# Altium PCB Ornament.PcbDoc
Units mil, origin at the board's own origin, x right, y up, seen from the top; angles counter-clockwise.
Board outline 3685 x 4010 mil, 2 copper layers (Top Layer, Bottom Layer); 87 components, 46 nets, 186 pads, 42 vias.
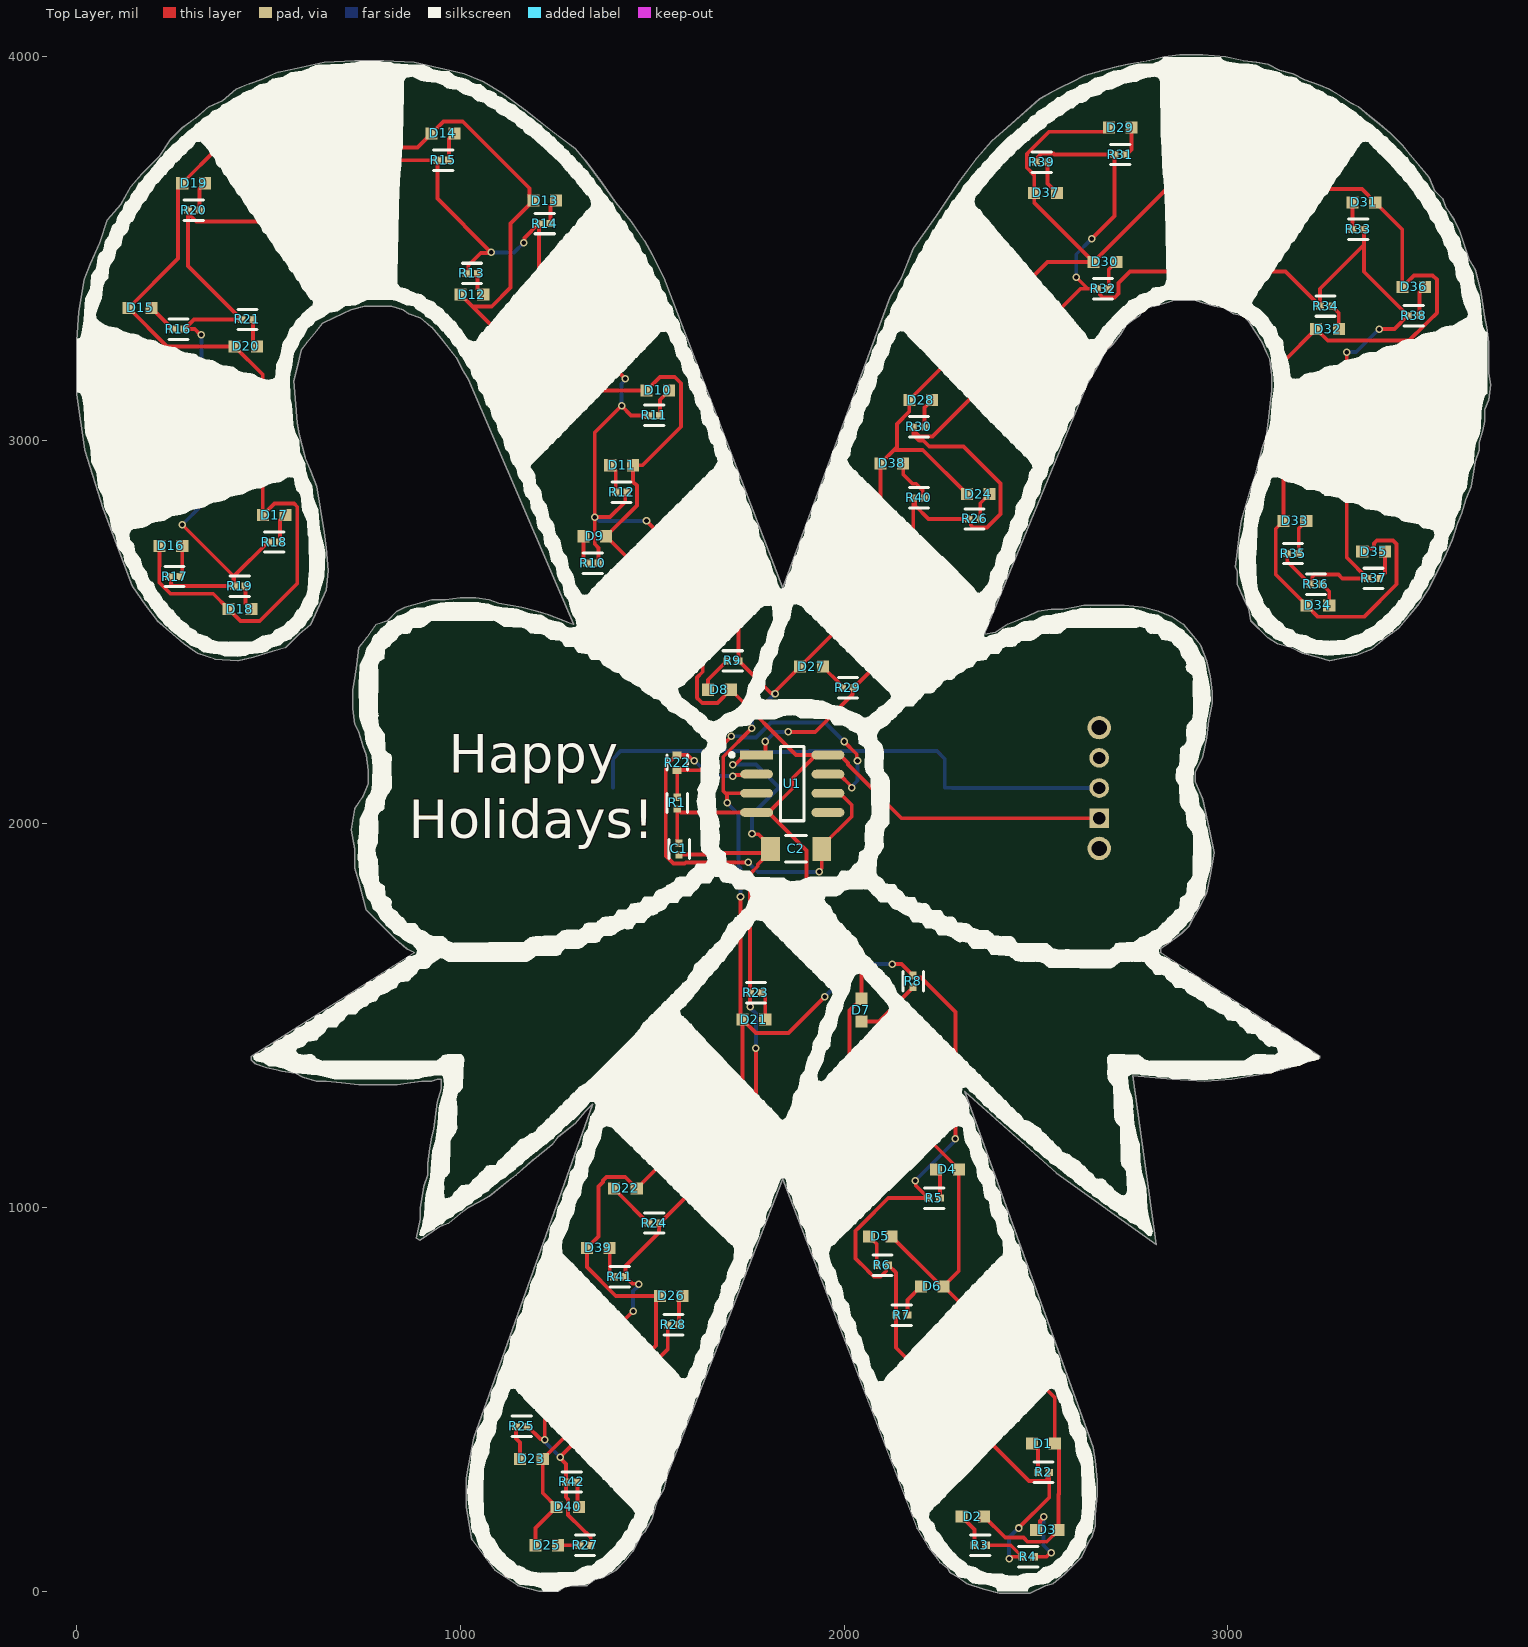
[diagram p0: Top Layer view]
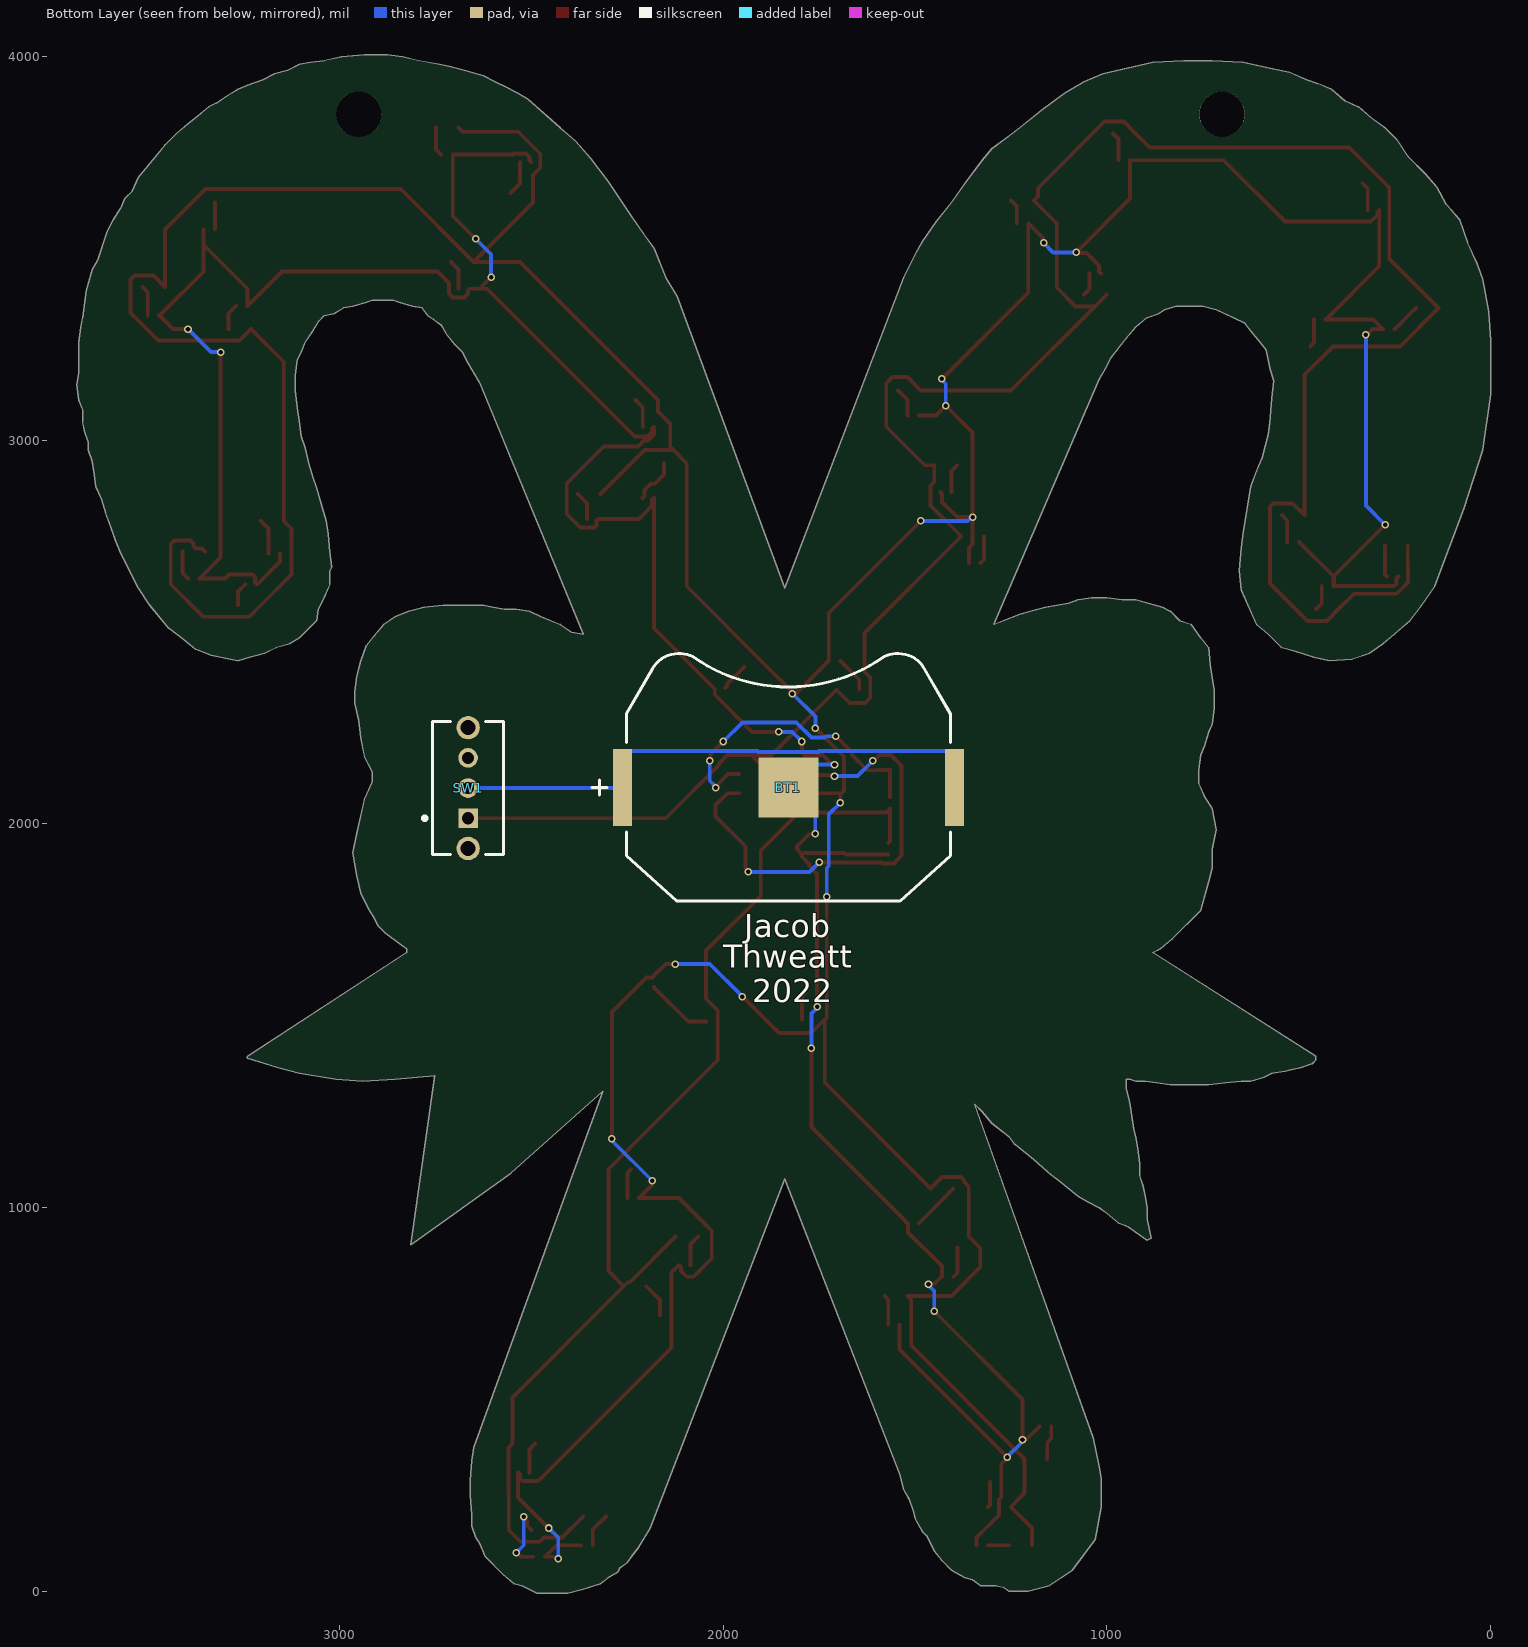
[diagram p1: Bottom Layer view, seen from below]
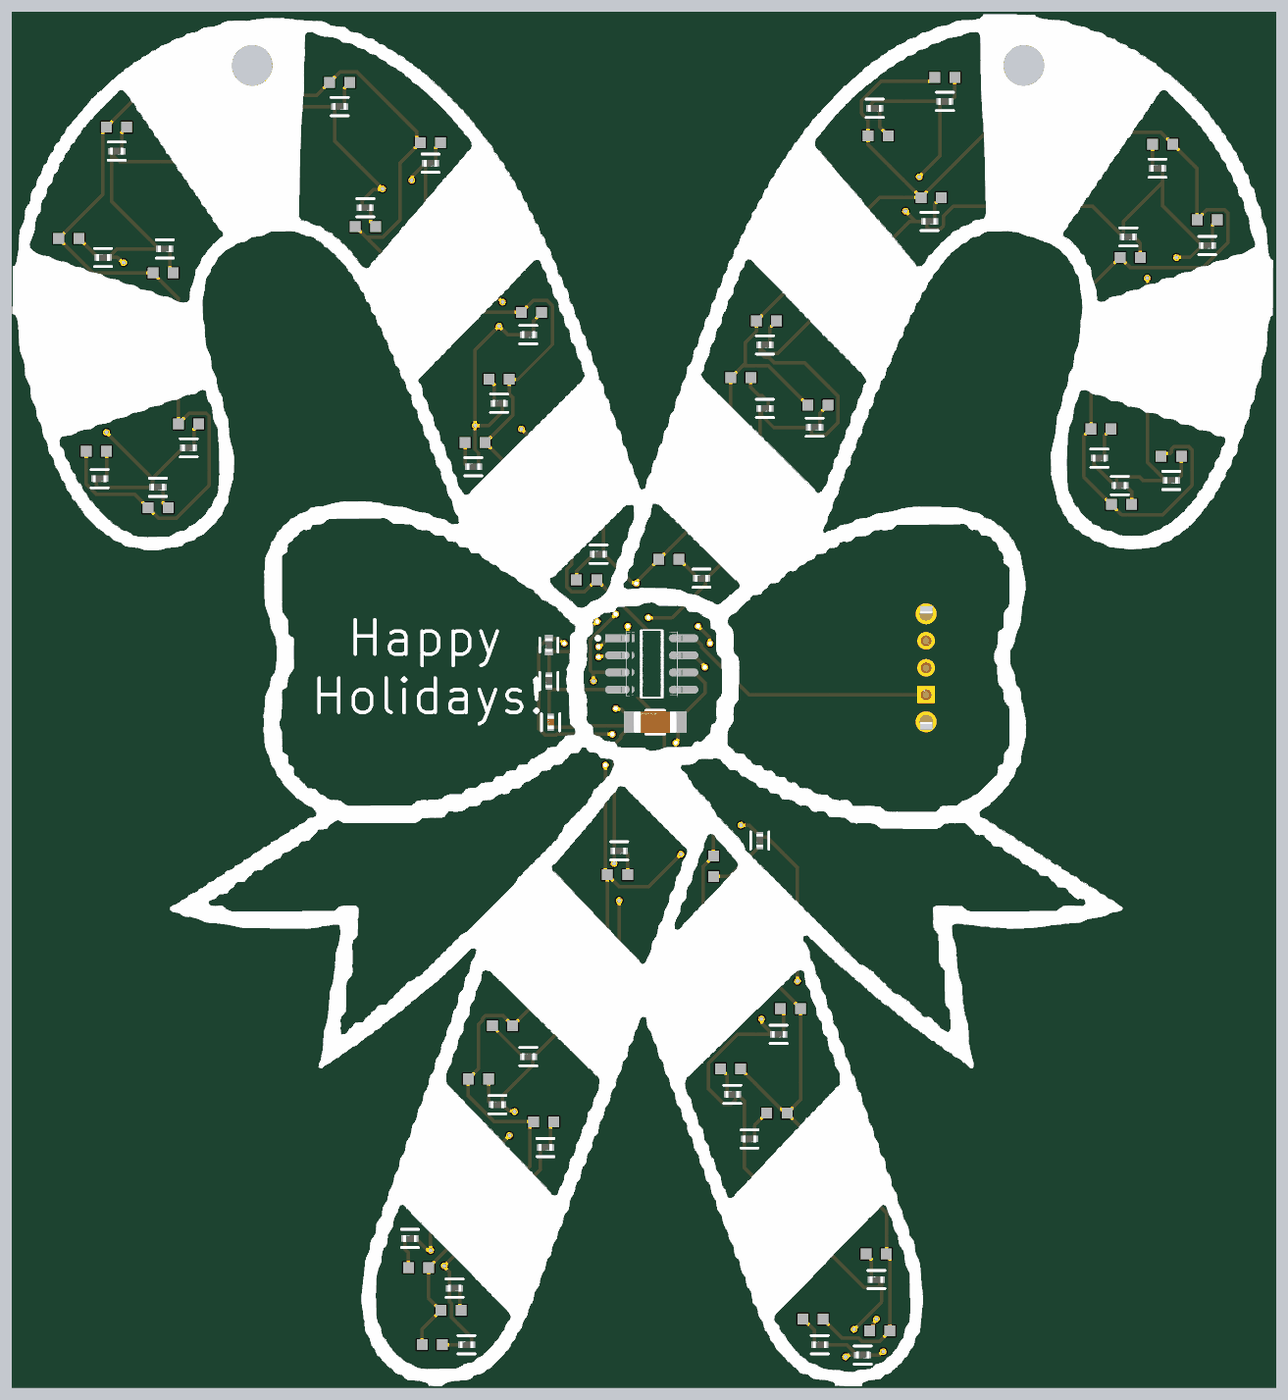
[diagram p2: 3D render of the assembled board from above, using the file's embedded part models]

## Layer stack, top to bottom
Top Solder: solder mask 0.4, Solder Resist, Dk 3.5
Top Layer: signal copper 1.4
Dielectric 1: dielectric 12.6, FR-4, Dk 4.8
Bottom Layer: signal copper 1.4
Bottom Solder: solder mask 0.4, Solder Resist, Dk 3.5

## Board outline
385 vertices, not listed, extent 0,-5 3685,4005

## Design rules (kind name [scope] priority, off if disabled: settings)
BoardOutlineClearance [All] p1: gap=7.87 ignorepadtopadclearanceinfootprint=FALSE except(15.75: Arc-SplitBarrior Arc-SplitContinuation Track-SplitBarrior Track-SplitContinuation SMDPad-SplitBarrior SMDPad-SplitContinuation THPad-SplitBarrior THPad-SplitContinuation Via-SplitBarrior Via-SplitContinuation Fill-SplitBarrior Fill-SplitContinuation Poly-SplitBarrior Poly-SplitContinuation Region-SplitBarrior Region-SplitContinuation Text-SplitBarrior Text-SplitContinuation)
Clearance "Clearance Bottom Layer" [OnLayer('Bottom Layer')] p1: gap=8 ignorepadtopadclearanceinfootprint=TRUE except(10: Arc-Text Track-Text SMDPad-Text THPad-Text Via-Text Fill-Text Poly-Text Region-Text Text-Text)
Clearance "Clearance Top Layer" [OnLayer('Top Layer')] p2: gap=8 ignorepadtopadclearanceinfootprint=TRUE except(10: Arc-Text Track-Text SMDPad-Text THPad-Text Via-Text Fill-Text Poly-Text Region-Text Text-Text)
Clearance [All] p3: gap=7.87 ignorepadtopadclearanceinfootprint=FALSE except(3.5: Arc-Arc Arc-Track Arc-SMDPad Track-Track Track-SMDPad SMDPad-SMDPad; 5: Arc-Via Track-Via SMDPad-Via THPad-Via Via-Via; 10: Arc-Text Track-Text SMDPad-Text THPad-Text Via-Text Fill-Text Poly-Text Region-Text Text-Text)
HoleSize [All] p1: absolutevalues=TRUE maxlimit=248.03 minlimit=7.87 maxpercent=80.000 minpercent=20.000
MinimumAnnularRing [All] p1: minimumring=3
MinimumSolderMaskSliver [All] p1: minsoldermaskwidth=3.94
PolygonConnect PolygonConnect_1 [All] p1: thpad.connectstyle=Relief thpad.reliefconductorwidth=20 thpad.reliefentries=4 thpad.polygonreliefangle="90 Angle" thpad.airgapwidth=10 smdpad.connectstyle=Relief smdpad.reliefconductorwidth=20 smdpad.reliefentries=4 smdpad.polygonreliefangle="90 Angle" smdpad.airgapwidth=10 via.connectstyle=Direct via.reliefconductorwidth=20 via.reliefentries=4 via.polygonreliefangle="90 Angle" via.airgapwidth=10
RoutingCorners [All] p1: cornerstyle=Round minsetback=100 maxsetback=100
RoutingVias [All] p1: holewidth=19.68 width=39.37 viastyle="Through Hole" minholewidth=7.87 minwidth=17.72 maxholewidth=39.37 maxwidth=78.74
SilkToSilkClearance [All] p1: silktosilkclearance=3.94
SilkToSolderMaskClearance [IsPad] p1: minsilkscreentomaskgap=3.94 clearancetoexposedcopper=TRUE
SolderMaskExpansion [All] p1: expansion=4 istentingtop=FALSE
Width [All] p1: maxlimit=100 minlimit=3.5 preferedwidth=15
25 further rules are at their usual default settings.

## Components (designator, comment, footprint, x,y, rotation, side; value= is the part's Value field where it differs from the comment)
BT1 "3034TR" FP-3034TR-MFG 1830,2121.5 r180 bottom
C1 "CL05B103KB5NNNC" FP-CL165-IPC_C 1570,1935 r270 top
C2 "JMK316BJ107ML-T" FP-MK316L-MFG 1875,1935 r180 top
D1 "KT-0603R" LED_0603 2519.53,385 r0 top
D2 "KT-0603R" LED_0603 2335.47,195 r0 top
D3 "KT-0603R" LED_0603 2529.53,160 r0 top
D4 "KT-0603R" LED_0603 2269.53,1100 r0 top
D5 "KT-0603R" LED_0603 2094.53,925 r0 top
D6 "KT-0603R" LED_0603 2230,795 r0 top
D7 "KT-0603R" LED_0603 2045,1515 r90 top
D8 "KT-0603R" LED_0603 1675,2350 r0 top
D9 "KT-0603R" LED_0603 1350,2750 r0 top
D10 "KT-0603R" LED_0603 1514.53,3130 r180 top
D11 "KT-0603R" LED_0603 1420,2935 r0 top
D12 "KT-0603R" LED_0603 1030,3380 r180 top
D13 "KT-0603R" LED_0603 1220,3625 r180 top
D14 "KT-0603R" LED_0603 954.53,3800 r180 top
D15 "KT-0603R" LED_0603 165,3345 r180 top
D16 "KT-0603R" LED_0603 245.47,2725 r180 top
D17 "KT-0603R" LED_0603 514.53,2805 r180 top
D18 "KT-0603R" LED_0603 425.47,2560 r180 top
D19 "KT-0603R" LED_0603 304.53,3670 r180 top
D20 "KT-0603R" LED_0603 440.47,3245 r180 top
D21 "C2290" LED_0603 1765,1490 r180 top
D22 "C2290" LED_0603 1430,1050 r0 top
D23 "C2290" LED_0603 1185,345 r0 top
D24 "C2290" LED_0603 2349.53,2860 r180 top
D25 "C2290" LED_0603 1225,120 r180 top
D26 "C2290" LED_0603 1549.53,770 r180 top
D27 "C2290" LED_0603 1915,2410 r180 top
D28 "C2290" LED_0603 2199.53,3105 r180 top
D29 "C2290" LED_0603 2719.53,3815 r180 top
D30 "C2290" LED_0603 2680,3465 r180 top
D31 "C2290" LED_0603 3355,3620 r0 top
D32 "C2290" LED_0603 3260,3290 r180 top
D33 "C2290" LED_0603 3175,2790 r180 top
D34 "C2290" LED_0603 3235,2570 r180 top
D35 "C2290" LED_0603 3380,2710 r180 top
D36 "C2290" LED_0603 3484.53,3400 r180 top
D37 "C2290" LED_0603 2525,3645 r180 top
D38 "C2290" LED_0603 2124.53,2940 r180 top
D39 "C2290" LED_0603 1359.53,895 r180 top
D40 "C2290" LED_0603 1280,220 r180 top
R1 "AC0402FR-071KL" FP-AC0402-IPC_C 1565,2054.9 r270 top
R2 "AC0402FR-071KL" FP-AC0402-IPC_C 2520,310 r180 top
R3 "AC0402FR-071KL" FP-AC0402-IPC_C 2355,120 r180 top
R4 "AC0402FR-071KL" FP-AC0402-IPC_C 2480.1,90 r0 top
R5 "AC0402FR-071KL" FP-AC0402-IPC_C 2235,1025 r0 top
R6 "AC0402FR-071KL" FP-AC0402-IPC_C 2100,850 r180 top
R7 "AC0402FR-071KL" FP-AC0402-IPC_C 2150.1,720 r0 top
R8 "AC0402FR-071KL" FP-AC0402-IPC_C 2180,1590 r270 top
R9 "AC0402FR-071KL" FP-AC0402-IPC_C 1710.1,2425 r180 top
R10 "AC0402FR-071KL" FP-AC0402-IPC_C 1344.9,2680 r180 top
R11 "AC0402FR-071KL" FP-AC0402-IPC_C 1505.1,3065 r0 top
R12 "AC0402FR-071KL" FP-AC0402-IPC_C 1419.9,2865 r180 top
R13 "AC0402FR-071KL" FP-AC0402-IPC_C 1030,3435 r0 top
R14 "AC0402FR-071KL" FP-AC0402-IPC_C 1220,3565 r0 top
R15 "AC0402FR-071KL" FP-AC0402-IPC_C 955,3730 r0 top
R16 "AC0402FR-071KL" FP-AC0402-IPC_C 265.1,3290 r180 top
R17 "AC0402FR-071KL" FP-AC0402-IPC_C 255.1,2645 r0 top
R18 "AC0402FR-071KL" FP-AC0402-IPC_C 515,2735 r0 top
R19 "AC0402FR-071KL" FP-AC0402-IPC_C 425.1,2620 r0 top
R20 "AC0402FR-071KL" FP-AC0402-IPC_C 305.1,3600 r0 top
R21 "AC0402FR-071KL" FP-AC0402-IPC_C 444.9,3315 r0 top
R22 "AC0402FR-0710KL" FP-AC0402-MFG 1565,2160 r270 top
R23 "AC0402FR-071KL" FP-AC0402-IPC_C 1770.1,1560 r0 top
R24 "AC0402FR-071KL" FP-AC0402-IPC_C 1505,960 r180 top
R25 "AC0402FR-071KL" FP-AC0402-IPC_C 1159.9,430 r180 top
R26 "AC0402FR-071KL" FP-AC0402-IPC_C 2340.1,2795 r0 top
R27 "AC0402FR-071KL" FP-AC0402-IPC_C 1325,120 r180 top
R28 "AC0402FR-071KL" FP-AC0402-IPC_C 1555.1,695 r0 top
R29 "AC0402FR-071KL" FP-AC0402-IPC_C 2010,2355 r180 top
R30 "AC0402FR-071KL" FP-AC0402-IPC_C 2195,3035 r0 top
R31 "AC0402FR-071KL" FP-AC0402-IPC_C 2719.9,3745 r0 top
R32 "AC0402FR-071KL" FP-AC0402-IPC_C 2675,3395 r0 top
R33 "AC0402FR-071KL" FP-AC0402-IPC_C 3339.9,3550 r180 top
R34 "AC0402FR-071KL" FP-AC0402-IPC_C 3255,3350 r0 top
R35 "AC0402FR-071KL" FP-AC0402-IPC_C 3170.1,2705 r0 top
R36 "AC0402FR-071KL" FP-AC0402-IPC_C 3230,2625 r0 top
R37 "AC0402FR-071KL" FP-AC0402-IPC_C 3380,2640 r0 top
R38 "AC0402FR-071KL" FP-AC0402-IPC_C 3485.1,3325 r0 top
R39 "AC0402FR-071KL" FP-AC0402-IPC_C 2515.1,3725 r0 top
R40 "AC0402FR-071KL" FP-AC0402-IPC_C 2195.1,2850 r0 top
R41 "AC0402FR-071KL" FP-AC0402-IPC_C 1415,820 r180 top
R42 "AC0402FR-071KL" FP-AC0402-IPC_C 1290.1,285 r0 top
SW1 "1825232-1" FP-1825232-1-MFG 2665,2093.74 r90 bottom
U1 "TLC555CDR" FP-D0008A-IPC_B 1865,2105 r0 top

## Footprints (in the part's own frame and the unit in brackets; to place one, negate y for a bottom-side part, rotate by r counter-clockwise, add the part's x,y. Pads: shape width x height; smd on the part's side, far side on the other; paste and mask are expansions set on the pad)
FP-3034TR-MFG [mil]
  rect 156x156 smd paste-39370.1 mask+0: 1(0,-26.5)
  rect 50x200 smd paste+0 mask+0: 2(-432.48,-26.5) 2(432.48,-26.5)
  silkscreen extent -512,-322 422,323, body extent -458,-331 458,317, height 170
FP-1825232-1-MFG [mm]
  rect 1.3x1.3 hole 0.8 paste-1000 mask+0: 1(-2,0)
  round 1.3 hole 0.8 paste-1000 mask+0: 2(0,0) 3(2,0)
  round 1.55 hole 1 paste-1000 mask+0: 4(-4,0) 5(4,0)
  silkscreen extent -4.4,-2.35 4.4,3, body extent -4.58,-2.15 4.59,5.15, height 3.53
FP-AC0402-IPC_C [mil]
  rect 20.29x18.6 smd paste+0 mask+0: 1(-14.9,0) 2(14.9,0)
  silkscreen extent -25,-27 25,27, body extent -29,-15 29,15, height 10
FP-AC0402-MFG [mm]
  rect 0.5x0.6 smd paste+0 mask+0: 1(-0.5,0) 2(0.5,0)
  silkscreen extent -0.5,-0.67 0.5,0.67, body extent -0.85,-0.4 0.85,0.4, height 0.25
FP-CL165-IPC_C [mil]
  rect 20.29x18.6 smd paste+0 mask+0: 1(-14.9,0) 2(14.9,0)
  silkscreen extent -25,-27 25,27, body extent -29,-15 29,15, height 10
FP-D0008A-IPC_B [mil]
  rect 85.4x22.92 smd paste+0 mask+0: 1(-93.06,75)
  rrect100% 85.4x22.92 smd paste+0 mask+0: 2(-93.06,25) 3(-93.06,-25) 4(-93.06,-75) 5(93.06,-75) 6(93.06,-25) 7(93.06,25) 8(93.06,75)
  silkscreen extent -162,-97 31,97, body extent -146,-106 146,106, height 10
FP-MK316L-MFG [mm]
  rect 1.25x1.6 smd paste+0 mask+0: 1(-1.7,0) 2(1.7,0)
  silkscreen extent -0.7,-0.87 0.7,0.87, body extent -2.42,-0.97 2.42,0.97, height 0.25
LED_0603 [mm]
  rect 0.8x0.8 smd: 1(0.75,0) 2(-0.75,0)
  body extent -1.27,-0.51 1.27,0.51, height 0.51

## Part data
BT1: library part CMP-19636-000007-1, "BATTERY RETAINER COIN 20MM SMD", Case/Package=SMD/SMT, Package Quantity=500, Contact Plating=Tin, Lead Free="Lead Free", Material=Bronze, Mount="Surface Mount", Number of Batteries=1, Number of Cells=1, Packaging="Tape and Reel", Termination=SMD/SMT
C1: library part CMP-13271-000387-1, "Cap Ceramic 10nF 50V X7R ±10% SMD 0402 +125°C Paper T/R", Capacitance=10nF, Case Code (Imperial)=0402, Case Code (Metric)=1005, Dielectric=X7R, Max Operating Temperature=125°C, Min Operating Temperature=-55°C, Package Quantity=1, Tolerance=10%, Voltage=50V, Case/Package=0402, Contact Plating=Tin, Depth=0.5mm, Height=0.5mm, Lead Free="Lead Free", Length=1mm, Material=Ceramic, Mount="Surface Mount", Packaging="Tape and Reel", Radiation Hardening=No, Thickness=0.022inch, Voltage Rating=50V, Voltage Rating (DC)=50V, Width=0.02inch
C2: library part CMP-2000-06499-2, "CAP CER 100UF 6.3V X5R 1206", Capacitance=100uF, Case Code (Imperial)=1206, Case Code (Metric)=3216, Dielectric=X5R, Max Operating Temperature=85°C, Min Operating Temperature=-55°C, Package Quantity=1, Tolerance=2%, Voltage Rating=6.3V, Case/Package=1206, Construction=Flat, Depth=1.6mm, Height=1.6mm, Lead Free="Lead Free", Length=3.2mm, Mount="Surface Mount", Number of Pins=2, Packaging="Tape and Reel", Radiation Hardening=No, RoHS Compliant=Yes, Series=M, Termination=SMD/SMT, Thickness=0.071inch, Voltage Rating (DC)=6.3V, Width=0.063inch
D1 D2 D3 D4 D5 D6 D7 D8 D9 D10 D11 D12 D13 D14 D15 D16 D17 D18 D19 D20: "Red 615~630nm 1.9~2.2V 0603 Light Emitting Diodes (LED) RoHS"
D21 D22 D23 D24 D25 D26 D27 D28 D29 D30 D31 D32 D33 D34 D35 D36 D37 D38 D39 D40: "White 0603 Light Emitting Diodes (LED) RoHS"
R1 R2 R3 R4 R5 R6 R7 R8 R9 R10 R11 R12 R13 R14 R15 R16 R17 R18 R19 R20 R21 R23 R24 R25 R26 R27 R28 R29 R30 R31 R32 R33 R34 R35 R36 R37 R38 R39 R40 R41 R42: library part CMP-2002-01799-3, "RES 1kΩ ±1% 0.063W 0402", Case Code (Imperial)=0402, Case Code (Metric)=1005, Max Operating Temperature=155°C, Max Power Dissipation=63mW, Min Operating Temperature=-55°C, Package Quantity=1, Power Rating=62.5mW, Resistance=1kR, Resistor Type="Thick Film", Temperature Coefficient=100ppm/°C, Tolerance=1%, Voltage Rating=50V, Case/Package=0402, Construction=Rectangular, Depth=0.5mm, Features="Moisture Resistant", Height=0.015inch, Lead Free="Lead Free", Length=0.039inch, Military Standard=Not, Number of Terminations=2, Packaging="Tape and Reel", RoHS Compliant=Yes, Series=AC, Size Code=0402, Termination=SMD/SMT, Width=0.02inch
R22: library part CMP-2002-01790-3, "RES 10kΩ ±1% 0.063W 0402", Case Code (Imperial)=0402, Case Code (Metric)=1005, Max Operating Temperature=155°C, Max Power Dissipation=63mW, Min Operating Temperature=-55°C, Power Rating=62.5mW, Resistance=10kR, Resistor Type="Thick Film", Temperature Coefficient=100ppm/°C, Tolerance=1%, Voltage Rating=50V, Case/Package=0402, Construction=Rectangular, Depth=0.5mm, Features="Moisture Resistant", Height=0.015inch, Lead Free="Lead Free", Length=0.039inch, Military Standard=Not, Number of Terminations=2, Packaging="Tape and Reel", RoHS Compliant=Yes, Series=AC, Size Code=0402, Termination=SMD/SMT, Width=0.02inch
SW1: library part CMP-03405-000001-1, "SWITCH SLIDE SPDT 200MA 30V", Contact Current Rating=0.2A, Contact Resistance=20mΩ, Manufacturer="TE Connectivity", Operating Force=200gf, Temperature="-20°C to +70°C", Temperature Range High=+70°C, Temperature Range Low=-20°C, Voltage Rating Dc=30V, Automotive=No, Category=Switch, ComponentLink2Description=Datasheet, ComponentLink2URL=https://www.te.com/commerce/DocumentDelivery/DDEController?Action=showdoc&DocId=Customer+Drawing%7F1825232%7FB2%7Fpdf%7FEnglish%7FENG_CD_1825232_B2.pdf%7F1825232-1, Device Class L1=Electromechanical, Device Class L2=Switches, Device Class L3="Slide Switches", Digikey Description="SWITCH SLIDE SPDT 200MA 30V", Electromechanical Life=10000Cycles, Height=3.7mm, Lead Free=Yes, Manufacturer Part Number=1825232-1, Mount="Through Hole", Mouser Description="Slide Switches SLIDE SWITCH SPDT Right Angle", Octopart=https://octopart.com/1825232-1-te+connectivity-45209882, Package=1825232-1, RoHS=TRUE, Throw Configuration=SPDT
U1: library part CMP-04857-000001-1, "IC OSC SGL TIMER 2.1MHZ 8-SOIC", Case/Package=SOIC, Current Rating=250A, Frequency=2.1MHz, High Level Output Current=-10mA, Low Level Output Current=100mA, Max Operating Temperature=125°C, Max Power Dissipation=725mW, Max Supply Voltage=15V, Min Operating Temperature=-40°C, Min Supply Voltage=2V, Operating Supply Current=360uA, Package Quantity=2500, Quiescent Current=250uA, Height=1.58mm, Lead Free="Lead Free", Length=4.9mm, Mount="Surface Mount", Number of Channels=1, Number of Pins=8, Number of Timers/Counters=1, Packaging="Tape and Reel", Power Dissipation=725mW, Radiation Hardening=No, REACH SVHC="No SVHC", Termination=SMD/SMT, Weight=0.002561oz, Width=3.91mm

## Free pads (board coordinates)
  round 118.11 hole 118.11: HOLE(700,3850) HOLE(2950,3850)

## Via types
v1: diameter 19.68, hole 11.81, Top Layer to Bottom Layer, 42 vias

## Nets (pads, with @x,y where several pads share a name; then routed paths per layer and width w, separated by ;. In a path a pad name is that pad's centre, name@x,y a point inside that pad or via, vN(x,y) a via of type N, cw(c..) or ccw(c..) an arc to the next point about the centre after c; other vN are vias at no path point)
3V: C1.1 D1.1 D2.1 D3.1 D4.1 D5.1 D6.1 D7.1 D8.1 D9.1 D10.1 D11.1 D12.1 D13.1 D14.1 D15.1 D16.1 D17.1 D18.1 D19.1 D20.1 R1.2 SW1.1 U1.4 U1.8 | length 9609.5
  Top Layer w10: D16.1 215.94,2672.32 215.05,2671.42 215.05,2629.49 244.42,2600.12 355.83,2600.12 D18.1 426.69,2529.25 476.96,2529.25 574.8,2627.09 574.8,2826.96 566.02,2835.75 515.75,2835.75 D17.1 485,3170.94 D20.1 235.47,3245 D15.1 264.25,3473.78 264.25,3659.25 D19.1 368.13,3763.13 888.13,3763.13 D14.1 955.75,3830.75 1006.02,3830.75 1179.72,3657.04 1179.72,3635.75 D13.1 1130.61,3565.13 1130.61,3398.37 1081.49,3349.25 1031.22,3349.25 ; D12.1 1031.22,3349.25 ; R1.2 R1.2@1565,2039.16 ; C1.1 1570,1950.75 1565,1955.75 R1.2@1565,2039.16 ; D5.1 2243.31,805.75 2248.78,805.75 D6.1 ; D2.1 2420,140 2467.29,140 2478.04,129.25 2528.31,129.25 D3.1 2559.06,252 2560.05,252.99 2560.05,334.25 2559.8,334.49 2559.8,374.25 D1.1 2549.06,505.47 D6.1 ; SW1.1 2149.87,2015 2010.16,2154.71 2010.16,2159.14 1989.3,2180 U1.8@1926.81,2180 ; 1031.22,3349.25 1250.47,3130 D10.1 1520,3165 1558.76,3165 1565.01,3158.75 1565.19,3158.75 1575,3148.94 1575,3035.35 1474.65,2935 D11.1 1450,2934.53 1450,2891.85 1459.95,2881.89 1459.95,2830.43 D9.1 1631.68,2497.85 1631.68,2396.68 1616.85,2381.85 1616.85,2371.26 1616.72,2371.13 1616.72,2328.87 1624.34,2321.25 1624.52,2321.25 1630.25,2315.52 1670.05,2315.52 D8.1 1874.53,2180 U1.8@1926.81,2180 ; R1.2@1565,2039.16 1574.16,2030 U1.4 U1.4@1803.19,2030 ; U1.4@1803.19,2030 1902.32,1930.86 1902.32,1812.66 2045,1669.98 D7.1 2014.25,1513.78 2014.25,1384.8 D4.1 2299.06,834.53 D6.1 ; U1.4@1803.19,2030 1865,2091.81 1865,2118.19 U1.8@1926.81,2180
GND: BT1.1 C1.2 C2.2 R23.1 R24.1 R25.1 R26.1 R27.1 R28.1 R29.1 R30.1 R31.1 R32.1 R33.1 R34.1 R35.1 R36.1 R37.1 R38.1 R39.1 R40.1 R41.1 R42.1 U1.1 | length 8462.8
  Top Layer w10: R25.1 1175.65,430 1208.8,396.85 1218.15,396.85 v1(1220,395) 1220,500 v1(1450,730) ; R27.1 1339.9,140.1 1310.49,169.51 1310.32,169.51 1288.57,191.25 1288.39,191.25 1280.78,198.87 1280.78,239.57 1275.19,245.16 1275.19,332.19 1260,347.38 v1(1260,350) 1540.19,630.19 R28.1 ; v1(1465,800) 1463.15,801.85 1448.89,801.85 1430.75,820 R41.1 1429.9,847.57 1518.03,935.7 1518.03,958.13 R24.1 1520.75,960 1525.05,964.3 1525.05,965.14 1770,1210.1 v1(1770,1415) ; C1.2 1679.01,1920.1 1683.76,1924.84 1788.46,1924.84 C2.2@1793.17,1920.14 ; v1(1710,2155) 1711.85,2156.85 1717.56,2156.85 1740.7,2180 U1.1 1788.54,2180 1795,2186.46 v1(1795,2215) ; v1(1755.19,1523.14) 1755.19,1870.06 1774.84,1889.71 1774.84,1894.88 1796.61,1916.65 1796.61,1923.54 C2.2 ; v1(1760,1975) 1761.85,1973.15 1776.81,1973.15 1808.07,1941.89 C2.2 ; C2.2@1793.17,1920.1 1804.63,1931.56 C2.2 ; v1(1855,2240) 1925,2240 2022.12,2337.12 2022.12,2352.22 R29.1 2025.75,2355 2030.05,2359.3 2030.05,2360.14 2180.19,2510.29 R40.1 2181.04,2850 2185.34,2845.7 2185.34,2829.66 2220,2795 2326.04,2795 2330.34,2790.7 2330.34,2778.56 2336.19,2772.7 2372.7,2772.7 2407.68,2807.68 2407.68,2838.74 2407.8,2838.87 2407.8,2887.2 2311.38,2983.62 2221.83,2983.62 2206.19,2999.26 2195.74,2999.26 2180.1,3014.9 R30.1 2180.94,3035 2185.24,3030.7 2185.24,3021.83 2197.07,3010 2230.78,3010 2615.78,3395 2635,3395 ; R39.1 2501.04,3725 2505.34,3729.3 2505.34,3738.17 2514.47,3747.3 2545.53,3747.3 2547.83,3745 R31.1 2705,3585 v1(2645,3525) ; v1(2605,3425) 2635,3395 ; R35.1 3155.19,2684.06 3214.25,2625 R36.1 ; R36.1@3220.24,2629.3 3220.24,2644.07 3226.1,2649.93 3288.35,2649.93 3298.28,2640 R37.1@3364.25,2640 ; v1(3310,3230) 3310,2694.25 R37.1@3364.25,2640 ; R33.1 3354.81,3509.93 ; R37.1 R37.1@3364.25,2640 ; v1(3395,3290) 3434.35,3290 R38.1@3469.35,3325 ; R38.1 R38.1@3469.35,3325 ; 2635,3395 2660.94,3395 2665.24,3390.7 2665.24,3386.36 2666.76,3384.84 2666.76,3380.31 2674.37,3372.7 2705.43,3372.7 2715,3382.27 2715,3410 2745,3440 3150.1,3440 R34.1 3240.1,3395.22 3354.81,3509.93 ; 3354.81,3509.93 3354.81,3439.54 R38.1@3469.35,3325
  Bottom Layer w10: v1(1220,395) 1221.85,393.15 1221.85,388.15 v1(1260,350) ; v1(1450,730) 1450,782.38 1465,797.38 v1(1465,800) ; v1(1710,2155) 1770,2155 BT1.1 1760,2025 v1(1760,1975) ; v1(1755.19,1523.14) 1755.19,1520.52 1770,1505.71 v1(1770,1415) ; v1(1795,2215) 1820,2240 v1(1855,2240) ; v1(2605,3425) 2605,3485 v1(2645,3525) ; v1(3310,3230) 3335,3230 v1(3395,3290)
NetBT1_2: BT1.2 SW1.2 | length 1435.3
  Bottom Layer w10: BT1.2@1397.52,2095 1397.52,2169.84 1417.52,2189.84 1750.16,2189.84 1752,2188 1908,2188 1909.84,2189.84 2242.48,2189.84 2262.48,2169.84 2262.48,2095 2282.48,2093.74 SW1.2
NetC2_1: C2.1 R22.1 U1.2 U1.6 | length 1211.9
  Top Layer w10: v1(1610,2165) 1607.38,2165 1592.69,2179.68 R22.1 1563.03,2179.68 1535,2151.65 1535,1917.44 1547.7,1904.74 1547.7,1904.57 1555.31,1896.95 1584.69,1896.95 1587.73,1900 v1(1750,1900) ; v1(1710,2125) 1712.62,2125 1715.15,2127.53 1769.47,2127.53 U1.2 ; v1(1935,1875) 1935,1877.62 1941.93,1884.55 C2.1 1941.93,1941.89 2020,2019.96 2020,2049.3 1989.3,2080 U1.6
  Bottom Layer w10: v1(1610,2165) 1650,2125 v1(1710,2125) ; v1(1750,1900) 1775,1875 v1(1935,1875)
NetD1_2: D1.2 R2.2 | length 81.3
  Top Layer w10: D1.2 2505.1,369.9 R2.2
NetD2_2: D2.2 R3.2 | length 89.1
  Top Layer w10: D2.2 2340.1,160.85 R3.2
NetD3_2: D3.2 R4.2 | length 195.4
  Top Layer w10: R4.2 2527.38,90 2537.38,100 v1(2540,100) ; D3.2 2510.75,170.75 2510.75,183.13 2520,192.38 v1(2520,194.87)
  Bottom Layer w10: v1(2520,194.87) 2520,120 v1(2540,100)
NetD4_2: D4.2 R5.2 | length 79.1
  Top Layer w10: D4.2 2249.9,1090.1 R5.2
NetD5_2: D5.2 R6.2 | length 83.3
  Top Layer w10: D5.2 2085.1,904.9 R6.2
NetD6_2: D6.2 R7.2 | length 89.7
  Top Layer w10: R7.2 2165,759.53 D6.2
NetD7_2: D7.2 R8.2 | length 172.6
  Top Layer w10: D7.2 2091.22,1485.47 2180,1574.25 R8.2
NetD8_2: D8.2 R9.2 | length 96.1
  Top Layer w10: D8.2 1645.47,2376.12 1694.35,2425 R9.2
NetD9_2: D9.2 R10.2 | length 74.4
  Top Layer w10: D9.2 1320.47,2688.68 1329.16,2680 R10.2
NetD10_2: D10.2 R11.2 | length 75
  Top Layer w10: R11.2 1520,3105.94 D10.2
NetD11_2: D11.2 R12.2 | length 76
  Top Layer w10: D11.2 1405,2920.47 R12.2
NetD12_2: D12.2 R13.2 | length 61.1
  Top Layer w10: R13.2 1044.9,3394.62 D12.2
NetD13_2: D13.2 R14.2 | length 66.1
  Top Layer w10: R14.2 1234.9,3610.38 D13.2
NetD14_2: D14.2 R15.2 | length 75.9
  Top Layer w10: R15.2 969.9,3785.85 D14.2
NetD15_2: D15.2 R16.2 | length 78.6
  Top Layer w10: D15.2 205.28,3334.25 205.28,3334.07 249.35,3290 R16.2
NetD16_2: D16.2 R17.2 | length 82.5
  Top Layer w10: R17.2 270.7,2645 275,2649.3 D16.2
NetD17_2: D17.2 R18.2 | length 75.9
  Top Layer w10: R18.2 529.9,2790.85 D17.2
NetD18_2: D18.2 R19.2 | length 66.2
  Top Layer w10: R19.2 440,2575 D18.2
NetD19_2: D19.2 R20.2 | length 75.8
  Top Layer w10: R20.2 320,3655.94 D19.2
NetD20_2: D20.2 R21.2 | length 74.2
  Top Layer w10: R21.2 459.81,3255.19 D20.2
NetD21_1: D21.1 D22.1 D23.1 D24.1 D25.1 D26.1 D27.1 D28.1 D29.1 D30.1 D31.1 D32.1 D33.1 D34.1 D35.1 D36.1 D37.1 D38.1 D39.1 D40.1 R2.1 R3.1 R4.1 R5.1 R6.1 R7.1 R8.1 R9.1 R10.1 R11.1 R12.1 R13.1 R14.1 R15.1 R16.1 R17.1 R18.1 R19.1 R20.1 R21.1 U1.3 | length 15939.5
  Top Layer w10: R17.1@240.32,2645.13 R17.1 241.04,2645 245.34,2640.7 245.34,2625.86 251.19,2620 R19.1 ; v1(275,2780) 408.08,2646.92 408.08,2622.11 R19.1 ; R16.1 R16.1@280.84,3290 ; R20.1 290.19,3453.96 R21.1@429.16,3315 ; R20.1@295.34,3595.7 295.34,3586.83 304.47,3577.7 304.65,3577.7 312.35,3570 535.82,3570 695.82,3730 R15.1 940.1,3629.9 v1(1080,3490) 1078.15,3488.15 1053.15,3488.15 1020.24,3455.24 1020.24,3439.3 1015.94,3435 R13.1 ; v1(325,3275) 322.38,3275 307.38,3290 R16.1@280.84,3290 ; R21.1 R21.1@429.16,3315 ; R18.1 499.25,2735 410.19,2645.94 R19.1 ; v1(1165,3515) 1166.85,3516.85 1166.85,3527.6 1204.25,3565 R14.1 1205.1,3384.9 v1(1430,3160) ; D25.1 1195.47,165 D40.1 1214.53,255.94 D23.1 1510,640.47 1510,760 D26.1 1405,770 1330,845 D39.1 1360.07,925.07 1360.07,1055.07 1371.72,1066.72 1371.72,1071.13 1380.59,1080 1429.53,1080 D22.1 1735.47,1325.94 D21.1 ; R10.1 1359.81,2719.84 1350,2729.65 v1(1350,2800) ; R12.1@1433.96,2865 1429.66,2860.7 1429.66,2839.66 1390,2800 v1(1350,2800) ; v1(1485,2790) 1725,2550 R9.1 1725.84,2425 1808.99,2341.85 1818.15,2341.85 v1(1820,2340) 1821.85,2341.85 1821.85,2346.38 D27.1 2095,2619.53 D38.1 2130,2975 ; R11.1 1445,3065 v1(1420,3090) 1350,3020 v1(1350,2800) ; v1(1695,2055) 1695,2080 ; v1(1730,1810) 1730,1495.47 D21.1 ; v1(1759.87,2250.13) 1685.16,2175.42 1685.16,2085.86 1691.02,2080 U1.3 ; v1(1950,1550) 1855,1455 1770.47,1455 D21.1 ; v1(2125,1635) 2149.9,1635 2174.86,1610.05 2175.7,1610.05 2180,1605.75 R8.1 ; R8.1@2184.3,1599.76 2200.24,1599.76 2290,1510 v1(2290,1180) ; v1(2185,1070) 2186.85,1068.15 2186.85,1057.4 R5.1@2219.25,1025 ; R5.1 R5.1@2219.25,1025 ; D24.1 2205,2975 2130,2975 ; R3.1 2434.35,120 R4.1@2464.35,90 ; v1@2437.62,90 R4.1@2464.35,90 ; v1(2455,165) 2534.9,244.9 R2.1 2534.06,310 2529.76,305.7 2529.76,293.56 2523.9,287.7 2482.3,287.7 2135.19,634.81 R7.1 2135.19,830.56 2115.75,850 2114.06,850 2109.76,845.7 2109.76,834.76 2095,820 2077.27,820 2061.95,835.31 2061.95,835.49 2030,867.44 2030,939.7 2036.25,945.95 2036.25,946.13 2043.87,953.75 2044.05,953.75 2115.3,1025 R5.1@2219.25,1025 ; R4.1 R4.1@2464.35,90 ; D29.1 2679.25,3804.25 2534.25,3804.25 2477.05,3747.05 2477.05,3710.31 2495.47,3691.89 D37.1 2495.47,3620 D30.1 ; D35.1 3358.73,2718.26 3374.92,2718.26 3380.78,2724.12 3380.78,2731.13 3388.39,2738.75 3430.66,2738.75 3440,2729.41 3440,2625 3355,2540 3235.47,2540 D34.1 3125,2650.47 3125,2769.53 D33.1 3145.47,3205 D32.1 3260.47,3260 3472.65,3260 3515.35,3302.7 3515.53,3302.7 3523.14,3310.31 3523.14,3310.49 3545,3332.35 3545,3418.94 3533.94,3430 3485,3430 D36.1 3455,3549.53 D31.1 3349.53,3655 2840.47,3655 D30.1 ; R16.1@280.84,3290 305.84,3315 R21.1@429.16,3315 ; 2130,2975 2137.87,2982.87 2137.87,3042.87 2170,3075 D28.1 2530,3465 D30.1
  Bottom Layer w10: v1(275,2780) 325,2830 v1(325,3275) ; v1(1080,3490) 1140,3490 v1(1165,3515) ; v1(1350,2800) 1352.62,2800 1362.62,2790 v1(1485,2790) ; v1(1420,3090) 1420,3147.38 1430,3157.38 v1(1430,3160) ; v1(1695,2055) 1725.16,2024.84 1725.16,1889.71 1730,1884.87 v1(1730,1810) ; v1(1759.87,2250.13) 1759.87,2279.87 v1(1820,2340) ; v1(1950,1550) 2035,1635 v1(2125,1635) ; v1(2185,1070) 2288.15,1173.15 2288.15,1178.15 v1(2290,1180) ; v1(2430,85) 2430,140 v1(2455,165)
NetD21_2: D21.2 R23.2 | length 74.4
  Top Layer w10: R23.2 1785.84,1560 1794.53,1551.32 D21.2
NetD22_2: D22.2 R24.2 | length 127.6
  Top Layer w10: D22.2 1411.22,1039.25 1411.22,1038.03 1489.25,960 R24.2
NetD23_2: D23.2 R25.2 | length 89.3
  Top Layer w10: R25.2 1145,398.53 1155.47,388.06 D23.2
NetD24_2: D24.2 R26.2 | length 75
  Top Layer w10: R26.2 2355,2835.94 D24.2
NetD25_2: D25.2 R27.2 | length 55.6
  Top Layer w10: D25.2 R27.2
NetD26_2: D26.2 R28.2 | length 78.8
  Top Layer w10: R28.2 1570,760.94 D26.2
NetD27_2: D27.2 R29.2 | length 76.4
  Top Layer w10: D27.2 1989.95,2364.58 1989.95,2359.3 1994.25,2355 R29.2
NetD28_2: D28.2 R30.2 | length 77.9
  Top Layer w10: R30.2 2209.9,3085.85 D28.2
NetD29_2: D29.2 R31.2 | length 76.4
  Top Layer w10: R31.2 2735.65,3745 2749.06,3758.4 D29.2
NetD30_2: D30.2 R32.2 | length 78.1
  Top Layer w10: R32.2 2689.9,3445.38 D30.2
NetD31_2: D31.2 R33.2 | length 70.2
  Top Layer w10: R33.2 3325,3619.53 D31.2
NetD32_2: D32.2 R34.2 | length 68.6
  Top Layer w10: R34.2 3270.75,3350 3289.53,3331.22 D32.2
NetD33_2: D33.2 R35.2 | length 93.1
  Top Layer w10: R35.2 3185,2770.47 D33.2
NetD34_2: D34.2 R36.2 | length 63.6
  Top Layer w10: R36.2 3245.75,2625 3264.53,2606.22 D34.2
NetD35_2: D35.2 R37.2 | length 76.6
  Top Layer w10: R37.2 3395.75,2640 3400.05,2644.3 3400.05,2645.14 3409.53,2654.62 D35.2
NetD36_2: D36.2 R38.2 | length 80.8
  Top Layer w10: R38.2 3500,3385.94 D36.2
NetD37_2: D37.2 R39.2 | length 90.2
  Top Layer w10: R39.2 2530,3669.53 D37.2
NetD38_2: D38.2 R40.2 | length 119.5
  Top Layer w10: D38.2 2154.06,2910.94 2178.03,2886.97 2188.03,2886.97 2204.86,2870.14 2204.86,2854.3 2209.16,2850 R40.2
NetD39_2: D39.2 R41.2 | length 80.1
  Top Layer w10: D39.2 1389.06,830.2 1399.25,820 R41.2
NetD40_2: D40.2 R42.2 | length 66.9
  Top Layer w10: R42.2 1305,224.53 D40.2
NetR1_1: R1.1 R22.2 U1.7 | length 803.2
  Top Layer w10: R1.1 R22.2 1595.97,2140.32 1596.13,2140.16 1624.44,2140.16 1664.4,2180.12 1664.4,2186.97 v1(1706.22,2228.78) ; U1.7 1987.15,2130 2020,2097.15 v1(2020,2095) ; v1(2000,2215) 2033.15,2181.85 2033.15,2166.85 v1(2035,2165)
  Bottom Layer w10: v1(1706.22,2228.78) 1732.55,2228.78 1736.06,2225.28 1770.14,2225.28 1809.71,2264.84 1950.16,2264.84 v1(2000,2215) ; v1(2020,2095) 2020,2097.62 2035,2112.62 v1(2035,2165)
pads on no net: SW1.3 SW1.4 SW1.5 U1.5

## Silkscreen, mask and mechanical layers (free items; w line width, h text height)
Top Overlay:
  region: 2112 vertices and 21 holes, not listed, extent 0.89,-0.89 3676.76,3999.11
  text "Happy" at 970,2133.33 h100
  text "Holidays!" at 865,1963.33 h100
Bottom Overlay:
  text "Jacob" at 1945,1705 h60
  text "Thweatt" at 2000,1625 h60
  text "2022" at 1925,1535 h60